# Altium PCB Charge_Deck.PcbDoc
Units mm, origin at the board's own origin, x right, y up, seen from the top; angles counter-clockwise.
Board outline 29 x 20.5 mm, 2 copper layers (Component Side, Bottom Layer), stack 0.325 mm thick; 12 components, 10 nets, 43 pads, 6 vias.
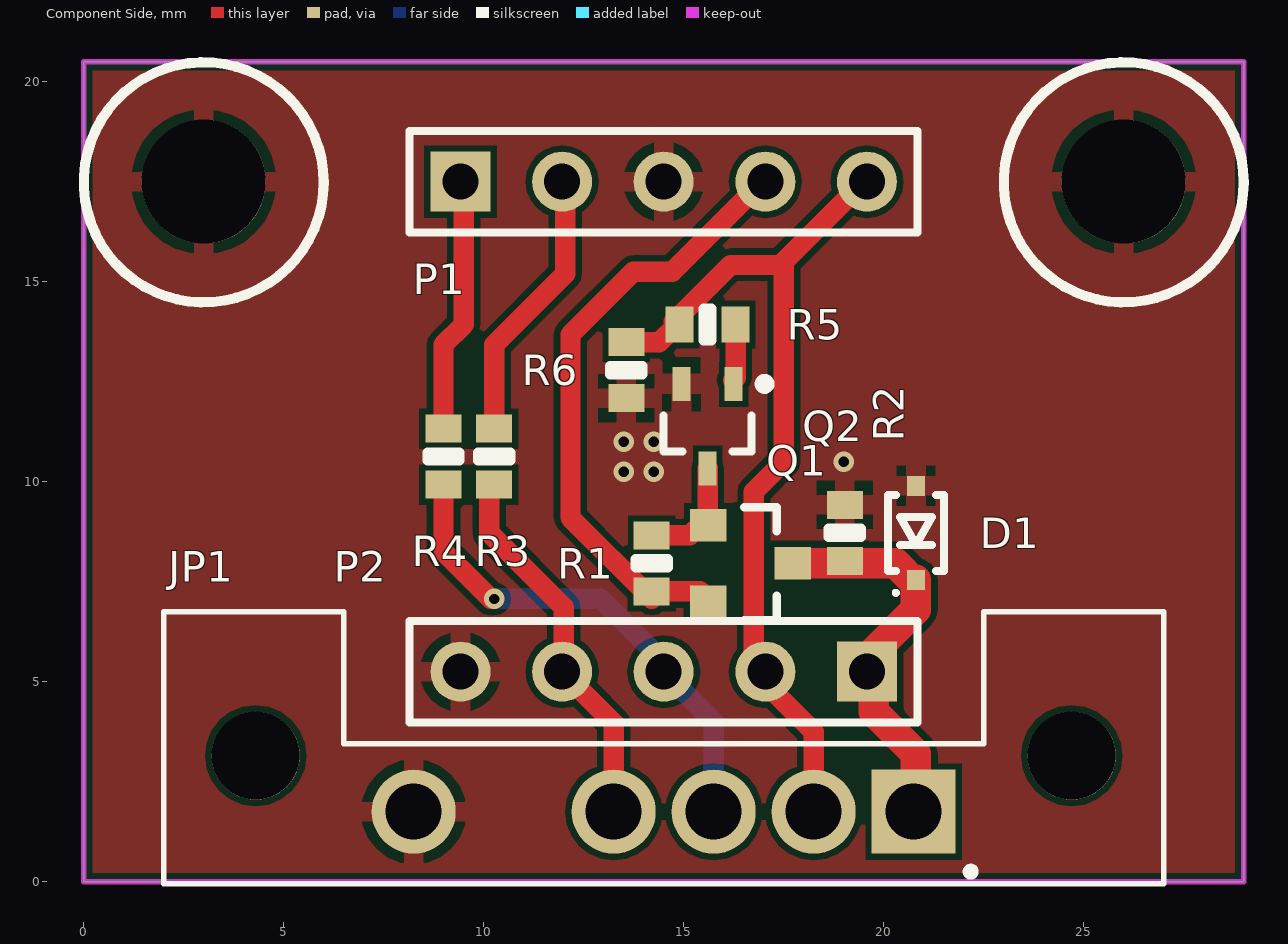
[diagram p0: Component Side view]
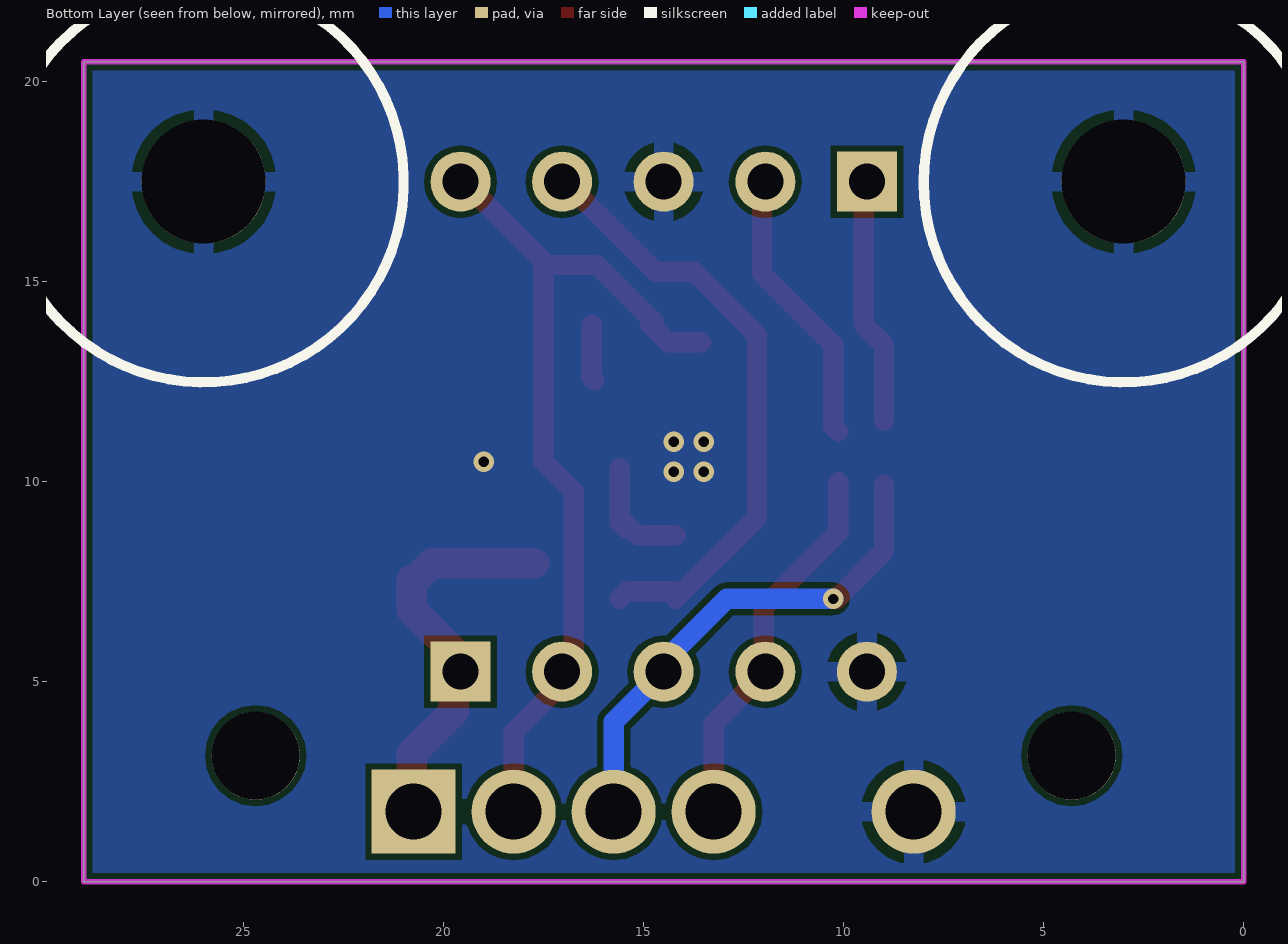
[diagram p1: Bottom Layer view, seen from below]
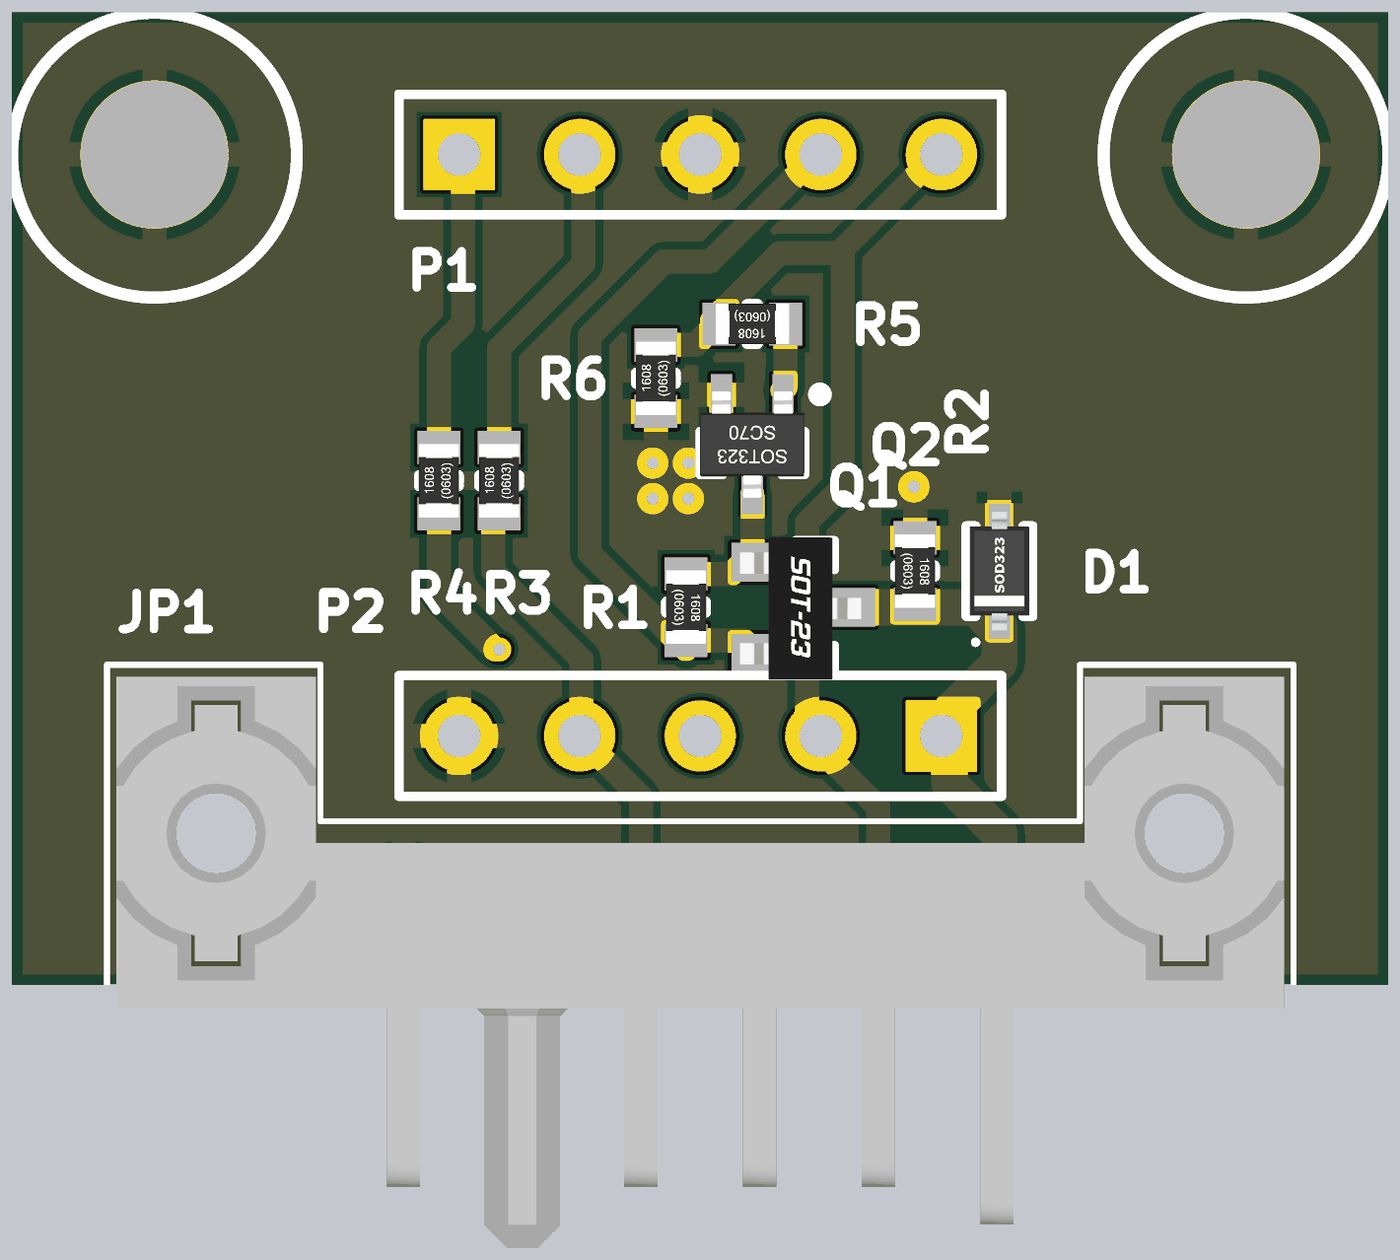
[diagram p2: 3D render of the assembled board from above, using the file's embedded part models]

## Layer stack, top to bottom
Top Solder: solder mask 0.0102, Solder Resist, Dk 3.5
Component Side: signal copper 0.0356
Dielectric 1: core 0.254, FR-4, Dk 4.2
Bottom Layer: signal copper 0.0356
Solder Side: solder mask 0.0102, Solder Resist, Dk 3.5

## Board outline
0,0 0,20.5 29,20.5 29,0

## Design rules (kind name [scope] priority, off if disabled: settings)
Clearance [All] p1: gap=0.152 ignorepadtopadclearanceinfootprint=FALSE except(0: Arc-Hole Track-Hole SMDPad-Hole THPad-Hole Via-Hole Fill-Hole Poly-Hole Region-Hole Text-Hole)
ComponentClearance [Not IsNetTieComponent vs Not IsNetTieComponent] p1 off: gap=0.254 collisioncheckmode=3 verticalgap=0.254 showdistances=FALSE
Height [All] p1 off: minheight=0 maxheight=25.4 prefheight=12.7
HoleSize [All] p1: absolutevalues=TRUE maxlimit=12.7 minlimit=0.025 maxpercent=80.000 minpercent=20.000
MinimumSolderMaskSliver [All] p1: minsoldermaskwidth=0.076
PlaneClearance [All] p1: clearance=0.203
PlaneConnect [All] p1: planeconnectstyle=Direct reliefexpansion=0.508 reliefentries=4 reliefconductorwidth=0.254 reliefairgap=0.254
PolygonConnect PolygonConnectLED [HasFootprint('XZMDKCBDDG45S-9')] p1: connectstyle=Direct reliefconductorwidth=0.254 reliefentries=4 polygonreliefangle="90 Angle" airgapwidth=0.254
PolygonConnect PolygonConnectPower [IsNamedPolygon('Power')] p2: connectstyle=Direct reliefconductorwidth=0.254 reliefentries=4 polygonreliefangle="90 Angle" airgapwidth=0.254
PolygonConnect PolygonConnectVDD [All vs InNet('VDD')] p3: connectstyle=Direct reliefconductorwidth=0.254 reliefentries=4 polygonreliefangle="90 Angle" airgapwidth=0.254
PolygonConnect PolygonConnectVia [All vs IsVia] p4: connectstyle=Direct reliefconductorwidth=0.254 reliefentries=4 polygonreliefangle="90 Angle" airgapwidth=0.254
PolygonConnect [All] p5: connectstyle=Relief reliefconductorwidth=0.508 reliefentries=4 polygonreliefangle="90 Angle" airgapwidth=0.254
RoomDefinition Charge_Deck [InComponentClass('Charge_Deck')] p1 off: confinementstyle=ConfineIn formatcopy=TRUE lockcomponents=FALSE outline 60.54,114.173 72.097,114.173 72.097,122.301 60.54,122.301
RoutingVias [All] p1: holewidth=0.254 width=0.508 viastyle="Through Hole" minholewidth=0.254 minwidth=0.508 maxholewidth=0.711 maxwidth=1.27
SilkToSilkClearance [All] p1: silktosilkclearance=0
SolderMaskExpansion SolderMaskExpansionVia [IsVia] p1: expansion=0.025 soldermaskfromhole=TRUE
SolderMaskExpansion [All] p2: expansion=0.076
Width [All] p1: maxlimit=12.7 minlimit=0.254 preferedwidth=0.254 minimp=50.000000 maximp=50.000000 favimp=50.000000
23 further rules are at their usual default settings.

## Components (designator, comment, footprint, x,y, rotation, side; value= is the part's Value field where it differs from the comment)
D1 "SP4021-01FTG" SOD-323 20.804,8.723 r90 top
JP1 "TE_MDI_6376042-2" TE_6376042-2 14.5,1.75 r180 top
P1 "Header 5" HDR1X5 9.42,17.5 r0 top
P2 "Header 5" HDR1X5 19.58,5.25 r180 top
Q1 "SI2309CDS-T1-GE3" SOT23-3 16.613,7.961 r270 top
Q2 "BSS123WQ-7-F" SOT323-3 15.597,11.39 r270 top
R1 "10K 1% 0603" R0603[1608] 14.2,7.961 r270 top value=10K
R2 "10K 1% 0603" R0603[1608] 19.026,8.723 r270 top value=10K
R3 "100R 1% 0603" R0603[1608] 10.263,10.628 r90 top value=100R
R4 "100R 1% 0603" R0603[1608] 8.993,10.628 r90 top value=100R
R5 "100R 1% 0603" R0603[1608] 15.597,13.93 r180 top value=100R
R6 "10K 1% 0603" R0603[1608] 13.565,12.787 r90 top value=10K

## Footprints (in the part's own frame and the unit in brackets; to place one, negate y for a bottom-side part, rotate by r counter-clockwise, add the part's x,y. Pads: shape width x height; smd on the part's side, far side on the other; paste and mask are expansions set on the pad)
HDR1X5 [mm] "Connector; Header; 5 Position"
  rect 1.5x1.5 hole 0.9: 1(0,0)
  round 1.5 hole 0.9: 2(2.54,0) 3(5.08,0) 4(7.62,0) 5(10.16,0)
  silkscreen extent -1.27,-1.27 11.43,1.27
R0603[1608] [mm] "Chip Resistor, Body 1.55x0.85mm"
  rect 0.7x0.9 smd: 1(-0.7,0) 2(0.7,0)
  silkscreen extent -0.1,-0.4 0.1,0.4, body extent -0.77,-0.42 0.78,0.43, height 0.45
SOD-323 [mm] "SODFL, 2-Leads, Body 1.30x2.57mm, IPC Medium Density"
  rect 0.5x0.45 smd: 1(-1.175,0) 2(1.175,0)
  silkscreen extent -1.55,-0.7 0.95,0.7, body extent -1.25,-0.63 1.25,0.62, height 0.98
SOT23-3 [mil]
  rect 32x36 smd: 1(-37.4,-39.37) 2(0,44) 3(38,-39.37)
  silkscreen extent -55,-4 56,28, body extent -58,-50 60,50, height 39
SOT323-3 [mm] "SOT23, 3-Leads, Body 2.00x2.10mm, Pitch 0.65mm, IPC Medium Density"
  rect 0.85x0.45 smd: 1(-1.055,0.65) 2(-1.055,-0.65) 3(1.055,0)
  silkscreen extent -1.18,-1.1 0.63,1.55, body extent -1.12,-1.1 1.12,1.1, height 1.1
TE_6376042-2 [mm]
  rect 2.1x2.1 hole 1.4: 1(-6.25,0)
  round 2.1 hole 1.4: 2(-3.75,0) 3(-1.25,0) 4(1.25,0) 5(6.25,0)
  round 2.2 hole 2.2 unplated: None(-10.2,-1.4) None(10.2,-1.4)
  silkscreen extent -12.5,-5 12.5,1.8, body extent -12.3,-4.75 12.3,7.3, height 5.8

## Part data
D1: Manufacturer=Littelfuse, Mounting Technology="Surface Mount", PackageReference=SOD-323-2, PartNumber=SP4021-01FTG
JP1: "BLADE CONNECTOR, 5 PIN, MALE, HORIZ", Manufacturer="TE Connectivity", PartNumber=6376042-2, Mounting Technology="Through Hole"
P1 P2: "Header, 5-Pin", LatestRevisionDate=17-Jul-2002, LatestRevisionNote="Re-released for DXP Platform.", Publisher="Altium Limited"
Q1: "P-Channel MOSFET", Manufacturer=Vishay, Mounting Technology="Surface Mount", PackageReference=SOT23-3, PartNumber=SI2309CDS-T1-GE3
Q2: "N-Channel MOSFET", Manufacturer="Diodes Incorporated", Mounting Technology="Surface Mount", PackageReference=SOT-323-3, PartNumber=BSS123WQ-7-F
R1 R2 R6: library part RES_10K_0603_1%, "10K 0.25W 1% 0603 (1005 Metric)", Manufacturer="Vishay / Dale", PartNumber=CRCW060310K0FKEAHP, Power=0.25W, Tolerance=1%, ComponentLink1Description=Datasheet, ComponentLink1URL=http://www.vishay.com/docs/20065/rcse3.pdf, Mounting Technology="Surface Mount", PackageDescription="0603 (1608 Metric)", PackageReference=0603
R3 R4 R5: library part RES_100R_0603_1%, "100R 0.25W 1% 0603 (1005 Metric)", Manufacturer="Vishay / Dale", PartNumber=CRCW0603100RFKEAHP, Power=0.25W, Tolerance=1%, ComponentLink1Description=Datasheet, ComponentLink1URL=http://www.vishay.com/docs/20043/crcwhpe3.pdf, Mounting Technology="Surface Mount", PackageDescription="0603 (1608 Metric)", PackageReference=0603

## Free pads (board coordinates)
  round 3.1 hole 3.1 mask+0: 0(3,17.5) 0(26,17.5)
  round 3.1 on Bottom Paste mask+0: 2(3,17.5) 2(26,17.5)
  round 3.1 on Top Paste mask+0: 2(3,17.5) 2(26,17.5)

## Via types
v1: diameter 0.508, hole 0.254, Component Side to Bottom Layer, 6 vias

## Nets (pads, with @x,y where several pads share a name; then routed paths per layer and width w, separated by ;. In a path a pad name is that pad's centre, name@x,y a point inside that pad or via, vN(x,y) a via of type N, cw(c..) or ccw(c..) an arc to the next point about the centre after c; other vN are vias at no path point)
5V: P1.4 Q1.3 R1.2 | length 15.5
  Component Side w0.508: R1.2@14.2,7.072 12.168,9.104 12.168,13.676 13.742,15.25 14.713,15.25 16.963,17.5 P1.4 P1.4@17.121,17.5 ; R1.2 15.408,7.261 Q1.3@15.597,7.072
GND: D1.2 JP1.5 P1.3 P2.5 pad.0 Q2.2 R2.1 R6.1
  other v1: 13.5,10.25 14.25,10.25 19,10.5 13.5,11 14.25,11
NetP1_1: P1.1 R4.2 | length 6.2
  Component Side w0.508: R4.2@8.993,11.517 8.993,13.422 9.501,13.93 P1.1@9.501,17.486
NetP1_2: P1.2 R3.2 | length 7.3
  Component Side w0.508: R3.2@10.136,11.263 10.263,11.39 10.263,13.422 12.041,15.2 12.041,17.5 P1.2@12.041,17.74
NetQ1_1: Q1.1 Q2.3 R1.1 | length 2.8
  Component Side w0.508: R1.1 15.154,8.661 Q1.1@15.47,8.977 ; Q1.1@15.47,8.85 Q1.1@15.533,8.914 ; Q1.1@15.597,8.977 Q2.3
NetQ2_1: Q2.1 R5.1 | length 1.4
  Component Side w0.508: Q2.1@16.232,12.533 16.297,12.598 R5.1
OUT: D1.1 JP1.1 P2.1 Q1.2 R2.2 | length 10.3
  Component Side w0.762: Q1.2 20.296,7.961 D1.1@20.804,7.453 ; JP1.1@20.423,1.905 JP1.1@20.804,2.286 ; JP1.1@20.75,2 20.804,2.054 JP1.1@20.804,2.286 ; D1.1 D1.1@20.804,7.453 ; JP1.1@20.804,2.286 20.804,3.196 19.75,4.25 19.75,5.75 20.804,6.804 D1.1@20.804,7.453
SCL: JP1.4 P2.4 R3.1 | length 9.8
  Component Side w0.508: R3.1@10.136,9.993 10.136,8.723 12,6.859 P2.4@12,5.25 ; P2.4 13.25,3.96 JP1.4 JP1.4@13.25,1.5
SDA: JP1.3 P2.3 R4.1 | length 12.6
  Component Side w0.508: R4.1 8.993,8.257 10.178,7.072 v1(10.263,7.072)
  Bottom Layer w0.508: v1(10.263,7.072) 12.928,7.072 P2.3@14.5,5.5 ; P2.3 15.75,4 JP1.3 JP1.3@15.75,1.5
TRIGGER: JP1.2 P1.5 P2.2 R5.2 R6.2 | length 22.5
  Component Side w0.508: R6.2 14.392,13.487 R5.2@14.835,13.93 ; R5.2@14.75,14 16.17,15.42 17.42,15.42 19.5,17.5 P1.5 ; P2.2@17,5.5 16.75,5.75 16.75,9.75 17.5,10.5 17.5,15.42 ; P2.2 17.04,4.96 18.25,3.75 JP1.2 JP1.2@18.25,1.5
  Bottom Layer w0.508: P2.2@17.04,5.21 P2.2 ; P2.2@17.145,5.355 P2.2@17.25,5.25 ; JP1.2@18,1.28 JP1.2@18.01,1.27
pads on no net: JP1.None

## Polygon pours and split planes (outlines as drawn)
GND on Bottom Layer "Bottom Layer-GND" (solid, remove dead copper, pour order 4): 0,0 29,0 29,20.5 0,20.5
GND on Component Side "Component Side-GND" (solid, remove dead copper, pour order 0): 0,0 29,0 29,20.5 0,20.5

## Keep-outs
Keep-Out Layer:
  the board outline again, w0.127

## Silkscreen, mask and mechanical layers (free items; w line width, h text height)
Top Overlay:
  circle w0.254: c26,17.486 r3
  circle w0.254: c3,17.486 r3
Bottom Overlay:
  circle w0.254: c26,17.486 r5
  circle w0.254: c3,17.486 r5